# Altium PCB Copy of PCB1.PcbDoc
Units mil, origin at the board's own origin, x right, y up, seen from the top; angles counter-clockwise.
Board outline 2955 x 1595 mil, 2 copper layers (Top Layer, Bottom Layer); 109 components, 71 nets, 326 pads, 42 vias.
Unrouted connection lines stored in the file: 84.
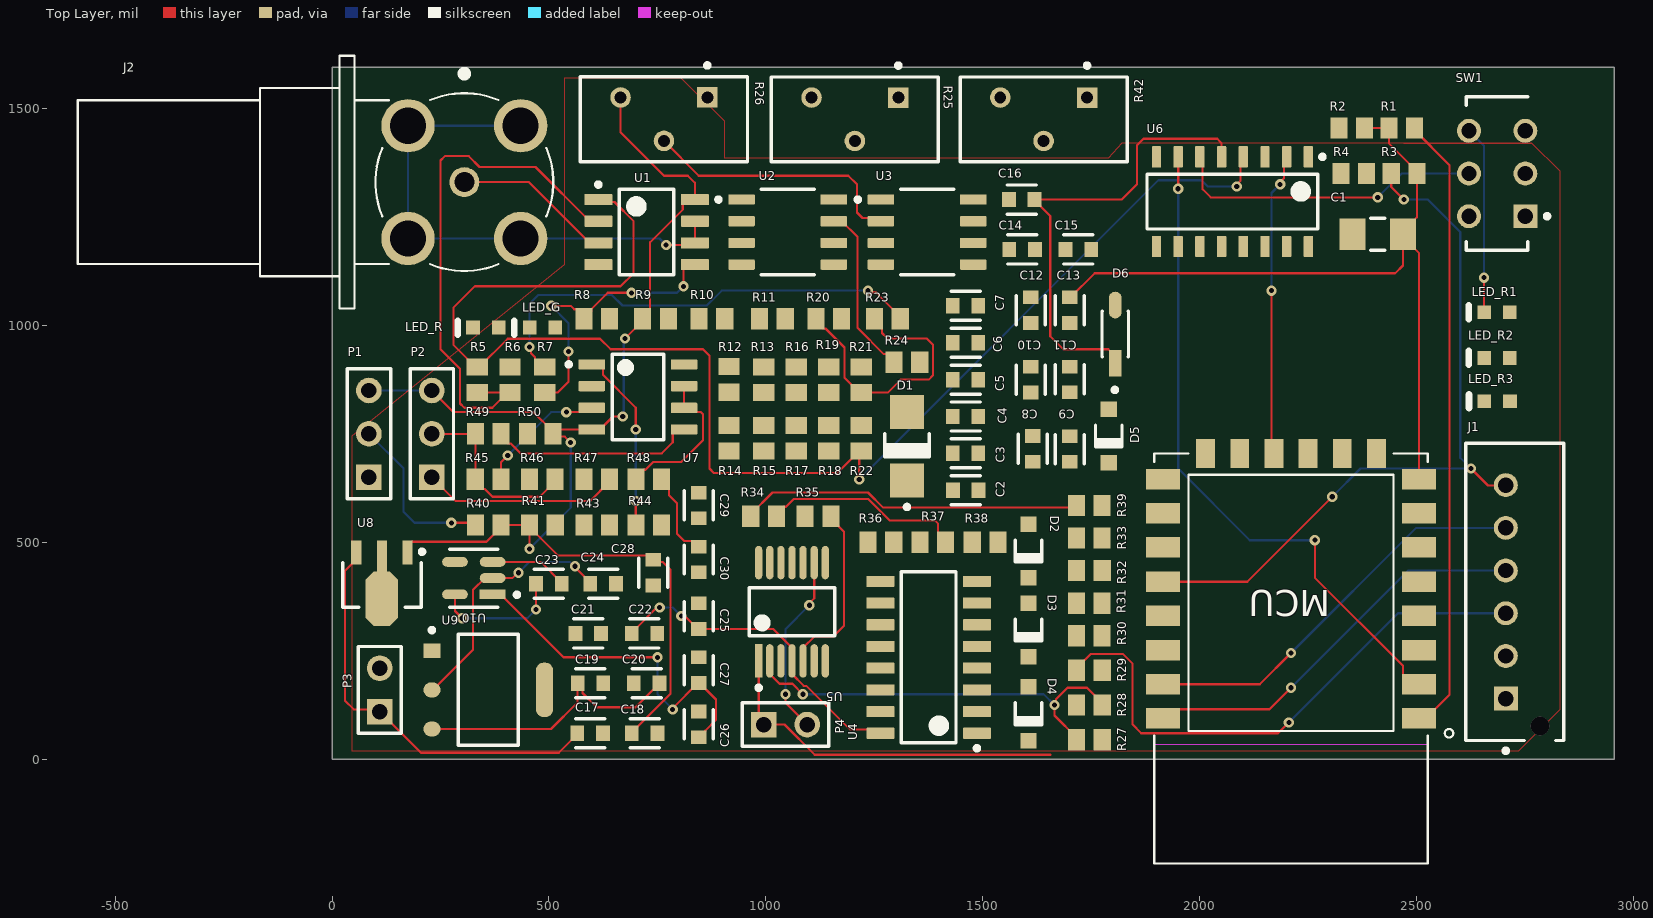
[diagram p0: Top Layer view]
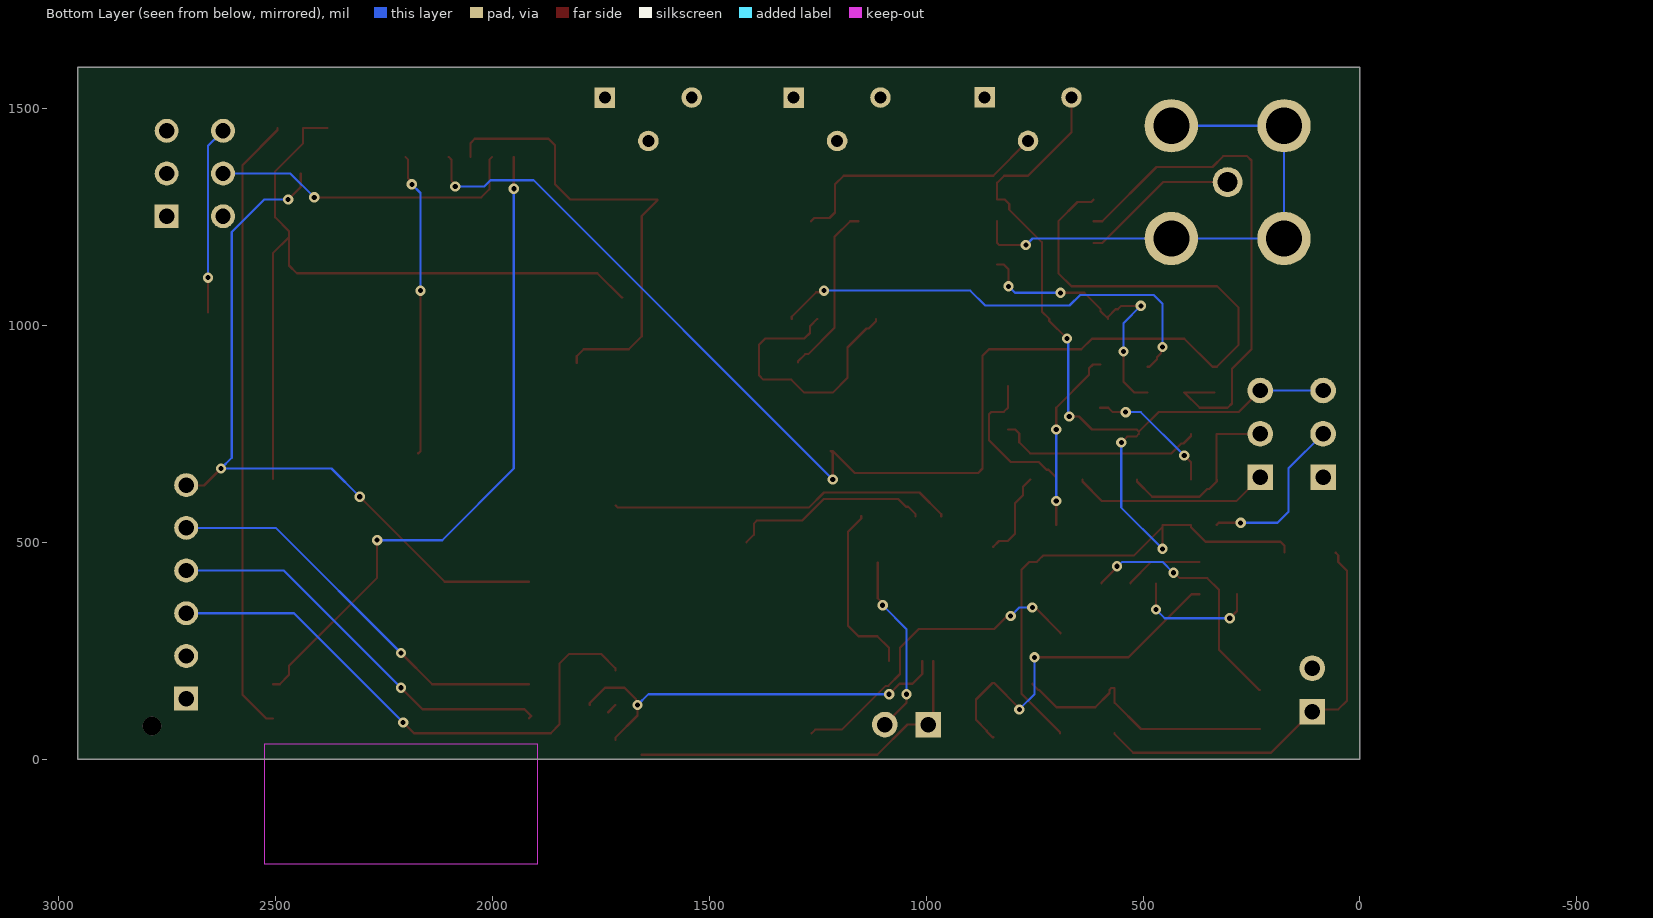
[diagram p1: Bottom Layer view, seen from below]

## Layer stack, top to bottom
Top Solder: solder mask 0.4, Solder Resist, Dk 3.5
Top Layer: signal copper 1.4
Dielectric 1: dielectric 12.6, FR-4, Dk 4.8
Bottom Layer: signal copper 1.4
Bottom Solder: solder mask 0.4, Solder Resist, Dk 3.5

## Board outline
0,0 2955,0 2955,1595 0,1595

## Design rules (kind name [scope] priority, off if disabled: settings)
BoardOutlineClearance [All] p1: gap=7.87 ignorepadtopadclearanceinfootprint=FALSE
Clearance [All] p1: gap=5 ignorepadtopadclearanceinfootprint=FALSE except(9.84: Arc-Hole Track-Hole SMDPad-Hole THPad-Hole Via-Hole Fill-Hole Poly-Hole Region-Hole Text-Hole)
ComponentClearance [All] p1: gap=5 collisioncheckmode=3 verticalgap=5 showdistances=TRUE
DiffPairsRouting [All] p1: maxlimit=10 minlimit=5 mostfreqgap=5 toplayer_minwidth=5 toplayer_maxwidth=1000 toplayer_prefwidth=5 bottomlayer_minwidth=5 bottomlayer_maxwidth=1000 bottomlayer_prefwidth=5 maxuncoupledlength=500
Height [All] p1: minheight=0 maxheight=71497.94 prefheight=500
HoleSize [All] p1: absolutevalues=TRUE maxlimit=248.03 minlimit=11.81 maxpercent=80.000 minpercent=20.000
HoleToHoleClearance [All] p1: gap=9.84 allowstackedmicrovias=FALSE
MinimumAnnularRing [All] p1: minimumring=3
MinimumSolderMaskSliver [All] p1: minsoldermaskwidth=0
PlaneClearance [All] p1: clearance=5
PlaneConnect PlaneConnectPowerPads [InPadClass('PowerPads')] p1: planeconnectstyle=Direct reliefexpansion=20 reliefentries=4 reliefconductorwidth=10 reliefairgap=10
PlaneConnect [All] p2: pad.planeconnectstyle=Relief pad.reliefexpansion=11.81 pad.reliefentries=4 pad.reliefconductorwidth=5 pad.reliefairgap=5 via.planeconnectstyle=Direct via.reliefexpansion=11.81 via.reliefentries=4 via.reliefconductorwidth=5 via.reliefairgap=5
PolygonConnect PolygonConnectPowerPads [All vs (InPadClass('PowerPads'))] p1: connectstyle=Direct reliefconductorwidth=10 reliefentries=4 polygonreliefangle="90 Angle" airgapwidth=10
PolygonConnect [All] p2: thpad.connectstyle=Relief thpad.reliefconductorwidth=5 thpad.reliefentries=4 thpad.polygonreliefangle="90 Angle" thpad.airgapwidth=5 smdpad.connectstyle=Relief smdpad.reliefconductorwidth=5 smdpad.reliefentries=4 smdpad.polygonreliefangle="90 Angle" smdpad.airgapwidth=5 via.connectstyle=Direct via.reliefconductorwidth=5 via.reliefentries=4 via.polygonreliefangle="90 Angle" via.airgapwidth=5
RoutingVias [All] p1: holewidth=11.81 width=23.62 viastyle="Through Hole" minholewidth=11.81 minwidth=23.62 maxholewidth=23.62 maxwidth=259.84
SilkToSilkClearance [All] p1: silktosilkclearance=0
SilkToSolderMaskClearance [IsPad] p1: minsilkscreentomaskgap=5 clearancetoexposedcopper=TRUE
SolderMaskExpansion [All] p1: expansion=2.95 istentingtop=FALSE
Width [All] p1: maxlimit=1000 minlimit=5 preferedwidth=5 minimp=50.000000 maximp=50.000000 favimp=50.000000
20 further rules are at their usual default settings.

## Classes and differential pairs
component class U_Temp_sensor: P1 R40
component class U_TBD_Sensor: C28 C29 C30 LED_R1 LED_R2 P2 R41 R42 R43 R44 R45 R46 R47 R48 R49 R50 SW1 U7
component class U_Power_supply: C17 C18 C19 C20 C21 C22 C23 C24 C25 C26 C27 J3 P3 U8 U9 U10
component class U_TDS_sensor: C8 C9 C10 C11 C12 C13 C14 C15 C16 D2 D3 D4 D5 D6 LED_R3 P4 R27 R28 R29 R30 R31 R32 R33 R34 R35 R36 R37 R38 R39 U4 U5
component class U_pH_sensor: C2 C3 C4 C5 C6 C7 D1 J2 LED_G LED_R R5 R6 R7 R8 R9 R10 R11 R12 R13 R14 R15 R16 R17 R18 R19 R20 R21 R22 R23 R24 R25 R26 U1 U2 U3
component class U_MCU: C1 MCU R1 R2 R3 R4 U6 U_MCU

## Components (designator, comment, footprint, x,y, rotation, side; value= is the part's Value field where it differs from the comment)
C1 "100uF" FP-GRM31M-0_15-IPC_A 2410,1210 r0 top
C2 "104" FP-CC0603-DA-MFG 1460.47,620 r180 top value="100 nF"
C3 "104" FP-CC0603-DA-MFG 1460,705 r0 top value="100 nF"
C4 "104" FP-CC0603-DA-MFG 1460,790 r180 top value="100 nF"
C5 "104" FP-CC0603-DA-MFG 1460,875 r180 top value="100 nF"
C6 "104" FP-CC0603-DA-MFG 1460,960 r180 top value="100 nF"
C7 "104" FP-CC0603-DA-MFG 1460,1045 r180 top value="100 nF"
C8 "100nF" FP-CC0603-DA-MFG 1615,715.47 r90 top value="100 nF"
C9 "1nF" FP-CC0603-DA-MFG 1700,715 r90 top value="100 nF"
C10 "100nF" FP-CC0603-DA-MFG 1610,875 r90 top value="100 nF"
C11 "4.7uF" FP-CC0603-DA-MFG 1700,875.47 r270 top value="100 nF"
C12 "100nF" FP-CC0603-DA-MFG 1610,1035 r270 top value="100 nF"
C13 "4.7uF" FP-CC0603-DA-MFG 1700,1035 r270 top value="100 nF"
C14 "100nF" FP-CC0603-DA-MFG 1590.47,1175 r0 top value="100 nF"
C15 "1uF" FP-CC0603-DA-MFG 1720,1175 r180 top value="100 nF"
C16 "1uF" FP-CC0603-DA-MFG 1589.53,1290 r180 top value="100 nF"
C17 "470uF" FP-CC0603-DA-MFG 595,60 r0 top value="100 nF"
C18 "1uF" FP-CC0603-DA-MFG 720.47,60 r0 top value="100 nF"
C19 "10uF" FP-CC0603-DA-MFG 595.47,175 r0 top value="100 nF"
C20 "100nF" FP-CC0603-DA-MFG 725,175 r180 top value="100 nF"
C21 "10uF" FP-CC0603-DA-MFG 590.47,290 r180 top value="100 nF"
C22 "100nF" FP-CC0603-DA-MFG 720,290 r0 top value="100 nF"
C23 "10uF" FP-CC0603-DA-MFG 499.53,405 r0 top value="100 nF"
C24 "100nF" FP-CC0603-DA-MFG 625,405 r0 top value="100 nF"
C25 "10uF" FP-CC0603-DA-MFG 845,330 r90 top value="100 nF"
C26 "10uF" FP-CC0603-DA-MFG 845,80.47 r90 top value="100 nF"
C27 "100nF" FP-CC0603-DA-MFG 845,205.47 r90 top value="100 nF"
C28 "10uF" FP-CC0603-DA-MFG 740,430 r270 top value="100 nF"
C29 "100nF" FP-CC0603-DA-MFG 845,585 r90 top value="100 nF"
C30 "100nF" FP-CC0603-DA-MFG 845,460.47 r270 top value="100 nF"
D1 "SZ1SMA5942BT3G" ONSC-SMA-2-403D-02_F_V 1325,721.26 r90 top
D2 "1N4148W-7-F" DIOD-SOD123-2_V 1605,480 r270 top
D3 "1N4148W-7-F" DIOD-SOD123-2_V 1605,297.99 r270 top
D4 "1N4148W-7-F" DIOD-SOD123-2_V 1605,105 r270 top
D5 "1N4148W-7-F" DIOD-SOD123-2_V 1790,745 r270 top
D6 "1N5819HW-7-F" FP-SOD123-IPC_A 1805,980 r90 top
J1 "B6B-XH-AM(LF)(SN)" FP-B6B-XH-AM_LF_SN-MFG 2725.67,385.79 r270 top
J2 "5-1634556-0" TE_5-1634556-0 304.92,1330.08 r0 top
LED_G "HSMY-C190" AVAG-HSMX-C190_V 485,995 r180 top
LED_R "HSMY-C190" AVAG-HSMX-C190_V 354.53,995 r180 top
LED_R1 "HSMY-C190" AVAG-HSMX-C190_V 2684.53,1030 r180 top
LED_R2 "HSMY-C190" AVAG-HSMX-C190_V 2684.53,925 r180 top
LED_R3 "HSMY-C190" AVAG-HSMX-C190_V 2685,825 r180 top
MCU "ESP8266-12E/ESP-12E" XCVR_ESP8266-12E/ESP-12E 2210,370 r180 top
P1 "Header 3" HDR1X3 85,650 r90 top
P2 "Header 3" HDR1X3 230,650 r90 top
P3 "Header 2" HDR1X2 110,110 r90 top
P4 "Header 2" HDR1X2 995,80 r0 top
R1 "10K" RESC2013X60X40LL20T25_A 2465,1455 r0 top
R2 "10K" RESC2013X60X40LL20T25_A 2350,1455 r0 top
R3 "10K" RESC2013X60X40LL20T25_A 2470.47,1350 r180 top
R4 "10K" RESC2013X60X40LL20T25_A 2354.53,1350 r0 top
R5 "10K" RESC2013X60X40LL20T25_A 335,875 r90 top
R6 "10K" RESC2013X60X40LL20T25_A 410,875 r270 top
R7 "10K" RESC2013X60X40LL20T25_A 490,875 r90 top
R8 "10K" RESC2013X60X40LL20T25_A 610,1015 r0 top
R9 "10K" RESC2013X60X40LL20T25_A 745.47,1015 r180 top
R10 "10K" RESC2013X60X40LL20T25_A 875.47,1015 r0 top
R11 "10K" RESC2013X60X40LL20T25_A 1015,1015 r0 top
R12 "10K" RESC2013X60X40LL20T25_A 915,875.47 r90 top
R13 "10K" RESC2013X60X40LL20T25_A 995,875 r90 top
R14 "10K" RESC2013X60X40LL20T25_A 915,740 r90 top
R15 "10K" RESC2013X60X40LL20T25_A 995,740 r90 top
R16 "10K" RESC2013X60X40LL20T25_A 1070,875 r90 top
R17 "10K" RESC2013X60X40LL20T25_A 1070,740 r90 top
R18 "10K" RESC2013X60X40LL20T25_A 1145,740 r90 top
R19 "10K" RESC2013X60X40LL20T25_A 1145,874.53 r90 top
R20 "1K" RESC2013X60X40LL20T25_A 1144.53,1015 r180 top
R21 "1K" RESC2013X60X40LL20T25_A 1220,874.53 r90 top
R22 "1K" RESC2013X60X40LL20T25_A 1220,740 r90 top
R23 "1K" RESC2013X60X40LL20T25_A 1280,1015 r180 top
R24 "20K" RESC2013X60X40LL20T25_A 1325,915 r180 top
R25 "3296Y-1-103LF" FP-3296Y-MFG 1205,1474.8 r90 top
R26 "3296Y-1-103LF" FP-3296Y-MFG 765,1475 r90 top
R27 "100K" RESC2013X60X40LL20T25_A 1745.47,45 r180 top
R28 "6.8K" RESC2013X60X40LL20T25_A 1745.47,125 r180 top
R29 "5.6K" RESC2013X60X40LL20T25_A 1745.47,205 r180 top
R30 "10K" RESC2013X60X40LL20T25_A 1745,285 r180 top
R31 "100K" RESC2013X60X40LL20T25_A 1745,360 r0 top
R32 "5.6K" RESC2013X60X40LL20T25_A 1745.47,435 r180 top
R33 "1M" RESC2013X60X40LL20T25_A 1745,510 r180 top
R34 "10K" RESC2013X60X40LL20T25_A 994.53,560 r0 top
R35 "10K" RESC2013X60X40LL20T25_A 1120,560 r180 top
R36 "10K" RESC2013X60X40LL20T25_A 1265,500 r0 top
R37 "10K" RESC2013X60X40LL20T25_A 1384.53,500 r180 top
R38 "10K" RESC2013X60X40LL20T25_A 1505,500 r180 top
R39 "5.6K" RESC2013X60X40LL20T25_A 1745,585 r180 top
R40 "4.7K" RESC2013X60X40LL20T25_A 360,540 r180 top
R41 "1K" RESC2013X60X40LL20T25_A 485,540 r0 top
R42 "3296Y-1-103LF|10K" FP-3296Y-MFG 1640,1474.8 r90 top
R43 "22R" RESC2013X60X40LL20T25_A 610,540 r180 top
R44 "100R" RESC2013X60X40LL20T25_A 730,540 r180 top
R45 "10K" RESC2013X60X40LL20T25_A 359.53,645 r180 top
R46 "4.7K" RESC2013X60X40LL20T25_A 484.53,645 r180 top
R47 "500R" RESC2013X60X40LL20T25_A 610,645 r180 top
R48 "1K" RESC2013X60X40LL20T25_A 730,645 r180 top
R49 "10K" RESC2013X60X40LL20T25_A 360,750 r180 top
R50 "1K" RESC2013X60X40LL20T25_A 480,750 r180 top
SW1 "JS202011CQN" FP-JS202011CQN-MFG 2685.04,1350 r90 top
U1 "TLC4502CDR" D0008A_M 725,1215 r0 top
U2 "LM358ADR" FP-D0008A-MFG 1050,1215 r0 top
U3 "LM358ADR" FP-D0008A-MFG 1371.3,1215 r0 top
U4 "CD4060BM" D0016A_M 1375,235 r180 top
U5 "LMV324IPWR" FP-PW0014A-IPC_A 1060,340 r90 top
U6 "SN74HC153DR" D0016A_L 2075,1285 r270 top
U7 "LMV358IDR" FP-D0008A-MFG 705,835 r0 top
U8 "L78L05ABUTR" SOT-89_N 115,401.5 r270 top
U9 "AMS1117-3.3" FP-AMS1117-IPC_C 360,160 r0 top
U10 "TPS60400DBVR" FP-DBV0005A-IPC_B 326.67,417.6 r180 top

## Footprints (in the part's own frame and the unit in brackets; to place one, negate y for a bottom-side part, rotate by r counter-clockwise, add the part's x,y. Pads: shape width x height; smd on the part's side, far side on the other; paste and mask are expansions set on the pad)
AVAG-HSMX-C190_V [mm] "SMD, 2-Leads, Body 1.6x0.8mm, Height 0.9mm"
  rect 0.8x0.8 smd: 1(-0.75,0) 2(0.75,0)
  silkscreen extent 1.65,-0.4 1.65,0.4, body extent -0.8,-0.4 0.8,0.4, height 0.9
D0008A_M [mm] "SOIC, 8-Leads, Body 5x4mm, Pitch 1.27mm, IPC Low Density"
  rrect15% 1.65x0.65 smd: 1(-2.825,1.905) 2(-2.825,0.635) 3(-2.825,-0.635) 4(-2.825,-1.905) 5(2.825,-1.905) 6(2.825,-0.635) 7(2.825,0.635) 8(2.825,1.905)
  silkscreen extent -2.95,-2.5 1.6,2.9, body extent -3,-2.45 3,2.45, height 1.63
D0016A_L [mm] "SOIC, 16-Leads, Body 10x4mm, Pitch 1.27mm, IPC High Density"
  rrect18% 1.25x0.55 smd: 1(-2.625,4.445) 2(-2.625,3.175) 3(-2.625,1.905) 4(-2.625,0.635) 5(-2.625,-0.635) 6(-2.625,-1.905) 7(-2.625,-3.175) 8(-2.625,-4.445) 9(2.625,-4.445) 10(2.625,-3.175) 11(2.625,-1.905) 12(2.625,-0.635) 13(2.625,0.635) 14(2.625,1.905) 15(2.625,3.175) 16(2.625,4.445)
  silkscreen extent -2.75,-5 1.6,5.4, body extent -3,-4.95 3,4.95, height 1.59
D0016A_M [mm] "SOIC, 16-Leads, Body 10x4mm, Pitch 1.27mm, IPC Low Density"
  rrect15% 1.65x0.65 smd: 1(-2.825,4.445) 2(-2.825,3.175) 3(-2.825,1.905) 4(-2.825,0.635) 5(-2.825,-0.635) 6(-2.825,-1.905) 7(-2.825,-3.175) 8(-2.825,-4.445) 9(2.825,-4.445) 10(2.825,-3.175) 11(2.825,-1.905) 12(2.825,-0.635) 13(2.825,0.635) 14(2.825,1.905) 15(2.825,3.175) 16(2.825,4.445)
  silkscreen extent -2.95,-5 1.6,5.44, body extent -3,-4.95 3,4.95, height 1.59
DIOD-SOD123-2_V [mm] "SOD123, 2-Leads, Body 2.7x1.55mm, Height 1.45mm"
  rect 0.9x0.95 smd: 1(-1.575,0) 2(1.575,0)
  silkscreen extent -0.64,-0.83 0.64,0.77, body extent -1.35,-0.77 1.35,0.77, height 1.45
FP-3296Y-MFG [mm]
  rect 1.2x1.2 hole 0.7 paste-1000 mask+0: 1(1.275,-2.54)
  round 1.2 hole 0.7 paste-1000 mask+0: 2(-1.265,0) 3(1.275,2.54)
  silkscreen extent -2.48,-4.89 3.27,4.89, body extent -2.58,-4.99 2.58,4.99, height 0.25
FP-AMS1117-IPC_C [mm]
  rect 1.004x0.872 smd paste+0 mask+0: 1(-3.295,2.29)
  rrect100% 1.004x0.872 smd paste+0 mask+0: 2(-3.295,0) 3(-3.295,-2.29)
  rrect87% 1.004x3.182 smd paste+0 mask+0: 4(3.295,0)
  silkscreen extent -3.42,-3.25 1.75,3.62, body extent -3.9,-3.35 3.9,3.35, height 0.25
FP-B6B-XH-AM_LF_SN-MFG [mm]
  rect 1.4x1.4 hole 0.9 paste-1000 mask+0: 1(6.25,-0.525)
  round 1.4 hole 0.9 paste-1000 mask+0: 2(3.75,-0.525) 3(1.25,-0.525) 4(-1.25,-0.525) 5(-3.75,-0.525) 6(-6.25,-0.525)
  round 1.1 hole 1.1 unplated paste-1000 mask+0: ""(7.85,1.475)
  silkscreen extent -8.7,-2.88 9.42,2.88, body extent -8.8,-2.98 8.8,2.98, height 0.25
FP-CC0603-DA-MFG [mm]
  rect 0.8x0.9 smd paste+0 mask+0: 1(-0.75,0) 2(0.75,0)
  silkscreen extent -0.85,-0.85 0.85,0.85, body extent -1.35,-0.75 1.35,0.75, height 0.25
FP-D0008A-MFG [mm]
  rrect17% 1.55x0.6 smd paste+0 mask+0: 1(-2.7,1.905) 2(-2.7,0.635) 3(-2.7,-0.635) 4(-2.7,-1.905) 5(2.7,-1.905) 6(2.7,-0.635) 7(2.7,0.635) 8(2.7,1.905)
  silkscreen extent -4.17,-2.5 1.55,2.5, body extent -3.57,-2.75 3.57,2.75, height 0.25
FP-DBV0005A-IPC_B [mm]
  rect 1.505x0.572 smd paste+0 mask+0: 1(-1.1,0.95)
  rrect100% 1.505x0.572 smd paste+0 mask+0: 2(-1.1,0) 3(-1.1,-0.95) 4(1.1,-0.95) 5(1.1,0.95)
  silkscreen extent -2.65,-1.7 1.4,1.7, body extent -2.1,-1.7 2.1,1.7, height 0.25
FP-GRM31M-0_15-IPC_A [mil]
  rect 59.28x73.16 smd paste+0 mask+0: 1(-58.12,0) 2(58.12,0)
  silkscreen extent -17,-37 17,37, body extent -107,-56 107,56, height 10
FP-JS202011CQN-MFG [mm]
  rect 1.4x1.4 hole 0.9 paste-1000 mask+0: 1(-2.5,-1.65)
  round 1.4 hole 0.9 paste-1000 mask+0: 2(0,-1.65) 3(2.5,-1.65) 4(2.5,1.65) 5(0,1.65) 6(-2.5,1.65)
  silkscreen extent -4.5,-3.05 4.5,1.8, body extent -4.6,-2.45 4.6,2.45, height 0.25
FP-PW0014A-IPC_A [mm]
  rect 1.955x0.421 smd paste+0 mask+0: 1(-2.875,1.95)
  rrect100% 1.955x0.421 smd paste+0 mask+0: 2(-2.875,1.3) 3(-2.875,0.65) 4(-2.875,0) 5(-2.875,-0.65) 6(-2.875,-1.3) 7(-2.875,-1.95) 8(2.875,-1.95) 9(2.875,-1.3) 10(2.875,-0.65) 11(2.875,0) 12(2.875,0.65) 13(2.875,1.3) 14(2.875,1.95)
  silkscreen extent -4.57,-2.5 1.4,2.5, body extent -4.35,-3 4.35,3, height 0.25
FP-SOD123-IPC_A [mil]
  rect 61.32x29.23 smd paste+0 mask+0: 1(-66.94,0)
  rrect100% 61.32x29.23 smd paste+0 mask+0: 2(66.94,0)
  silkscreen extent -134,-31 52,31, body extent -117,-50 117,50, height 10
HDR1X2 [mm] "Connector; Header; 2 Position"
  rect 1.5x1.5 hole 0.9: 1(0,0)
  round 1.5 hole 0.9: 2(2.54,0)
  silkscreen extent -1.27,-1.27 3.81,1.27
HDR1X3 [mm] "Connector; Header; 3 Position"
  rect 1.5x1.5 hole 0.9: 1(0,0)
  round 1.5 hole 0.9: 2(2.54,0) 3(5.08,0)
  silkscreen extent -1.27,-1.27 6.35,1.27
ONSC-SMA-2-403D-02_F_V [mm] "Molded, 2-Leads, Body 4.32x2.6mm"
  rect 2x2 smd: 1(-2,0) 2(2,0)
  silkscreen extent -3.67,-1.3 0.74,1.3, body extent -2.16,-1.3 2.16,1.3, height 2.2
RESC2013X60X40LL20T25_A [mm] "Chip Resistor, 2-Leads, Body 2.20x1.35mm, IPC High Density"
  rect 1x1.25 smd: 1(-0.75,0) 2(0.75,0)
  body extent -1.1,-0.67 1.1,0.67, height 0.6
SOT-89_N [mm] "SOT89, 3-Leads, Body 4.5x2.4 mm, Pitch 1.5mm, Lead Span 4.1mm, IPC Medium Density"
  rect 1.4x0.6 smd: 1(-1.9,1.5) 3(-1.9,-1.5)
  rect 1.8x0.6 smd: 2(-1.7,0)
  oct 3.2x1.9 smd: 2(0.8,0)
  silkscreen extent -2.07,-2.3 1.3,2.48, body extent -1.3,-2.3 1.3,2.3, height 1.6
TE_5-1634556-0 [mm]
  round 1.755 hole 1.17: 1(0,0)
  round 3.126 hole 2.11: 2(3.3,3.3) 3(-3.3,3.3) 4(-3.3,-3.3) 5(3.3,-3.3)
  silkscreen extent -22.63,-7.4 5.2,7.4
XCVR_ESP8266-12E/ESP-12E [mm]
  rect 2x1.2 smd: 1(-7.5,7) 2(-7.5,5) 3(-7.5,3) 4(-7.5,1) 5(-7.5,-1) 6(-7.5,-3) 7(-7.5,-5) 8(-7.5,-7) 15(7.5,-7) 16(7.5,-5) 17(7.5,-3) 18(7.5,-1) 19(7.5,1) 20(7.5,3) 21(7.5,5) 22(7.5,7)
  rect 1.1x1.7 smd: 9(-5,-8.5) 10(-3,-8.5) 11(-1,-8.5) 12(1,-8.5) 13(3,-8.5) 14(5,-8.5)
  Keep-Out Layer region: 8,8.51 -8.009,8.51 -8.009,15.5 8,15.5
  Keep-Out Layer region: 8,8.51 -8.009,8.51 -8.009,15.5 8,15.5
  silkscreen extent -9.5,-8.5 8,15.5, body extent -8,-12 8,12, height 3

## Part data
C1: library part CMP-06035-007547-1, "Chip Multilayer Ceramic Capacitors for General Purpose, 1206, 0.10uF, SL, +350/-1000ppm/°C, 5%, 50V", Capacitance=100nF, Case Code (Imperial)=1206, Case Code (Metric)=3216, Dielectric Material=Ceramic, Max Operating Temperature=125°C, Min Operating Temperature=-55°C, Temperature Coefficient=-1000ppm/°C, Tolerance=5%, Voltage=50V, Case/Package=1206, Depth=1.6mm, Dissipation Factor=0.025%, Height=1.15mm, Length=0.126inch, Mount="Surface Mount", Packaging="Tape and Reel", Termination=SMD/SMT, Thickness=0.049inch, Voltage Rating=50V, Voltage Rating (DC)=50V, Width=0.063inch
C2 C3 C4 C5 C6 C7 C8 C9 C10 C11 C12 C13 C14 C15 C16 C17 C18 C19 C20 C21 C22 C23 C24 C25 C26 C27 C28 C29 C30: library part CMP-03422-001228-1, "CAP CER 0.1UF 10V X7R 0603", Capacitance="100 nF", Manufacturer=YAGEO, Manufacturer Part Number=CC0603KRX7R6BB104, Package=CC0603-DA, Temperature="-55°C to +125°C", Temperature Characteristic=X7R, Temperature Coefficient=15%, Temperature Range High=+125°C, Temperature Range Low=-55°C, Tolerance=0.1, Voltage="10 V", Automotive=No, Category=Cap, ComponentLink2Description=Datasheet, ComponentLink2URL=http://www.yageo.com/documents/recent/UPY-GPHC_X7R_6.3V-to-50V_18.pdf, Device Class L1="Passive Components", Device Class L2=Capacitors, Device Class L3="Ceramic Capacitors", Digikey Description="CAP CER 0.1UF 10V X7R 0603", Footprint Url=http://www.yageo.com/exep/pages/download/literatures/UPY-C_GEN_24.pdf, Height=0.9mm, Lead Free=Yes, Material=Ceramic, Mouser Description="0603 0.1 uF 10 V ±10 % Tolerance X7R SMT Multilayer Ceramic Capacitor", Octopart=https://octopart.com/cc0603krx7r6bb104-yageo-9291607, RoHS=TRUE, Voltage Rating="10 V"
D1: library part CMP-1060-00121-1, "1.5 W Zener Voltage Regulator, 2-Pin SMA, Pb-Free, Tape and Reel", Manufacturer="On Semiconductor", ComponentLink1Description="Manufacturer URL", ComponentLink1URL=http://www.onsemi.com/, ComponentLink2Description=Datasheet, ComponentLink2URL=http://www.onsemi.com/pub_link/Collateral/1SMA5913BT3-D.PDF, ComponentLink3Description="Package Specification", ComponentLink3URL=http://www.onsemi.com/pub_link/Collateral/1SMA5913BT3-D.PDF, DatasheetVersion="Rev. 8", Mounting Technology="Surface Mount", PackageDescription="2-Pin Small Molded Package, J-Bend Lead, Body 2.605 x 4.315 mm", PackageReference=SMA-2-403D-02_F, PackageVersion="Rev. F, 11/2008", Packing="Tape and Reel", PartNumber=SZ1SMA5942BT3G, RoHS=Pb-Free, VZ Typ (V)=51
D2 D3 D4 D5: library part CMP-2000-04932-2, "Fast Switching Diode, 100 V, 0.15 A, -65 to 150 degC, 2-Pin?SOD123, RoHS, Tape and Reel", If - Forward Current=0.15A, Ir - Reverse Current=1uA, Manufacturer=DiodesIncorporated, Max Surge Current=2A, Maximum Operating Temperature=+150C, Minimum Operating Temperature=-65C, Operating Temperature Range=-65Cto+150C, Package / Case=SOD-123, Package Reference=SOD123-2, Peak Reverse Voltage=100V, Vf - Forward Voltage=1.25V, Brand=DiodesIncorporated, Configuration=Single, Datasheet URL=http://www.farnell.com/datasheets/1915529.pdf, Datasheet Version="Rev. 24-2, 10/2013", Factory Pack Quantity=3000, Height=1.25mm, Length=2.85mm, Manufacturer URL=http://www.diodes.com/, Mounting Style=SMD/SMT, Package URL=http://www.diodes.com/datasheets/ds18004.pdf, Packaging=Reel, Product=SwitchingDiodes, Product Category=Diodes-GeneralPurpose,Power,Switching, Recovery Time=4ns, RoHS=True, Series=1N4148, Type=SwitchingDiode, Unit Weight=0.000353oz, Width=1.7mm
D6: library part CMP-0303-00003-3, "DIODE SCHOTTKY 40V 1A SOD123", Average Rectified Current=1A, Capacitance=110pF, Case/Package=SOD-123-2, Forward Voltage=450mV, Max Forward Surge Current (Ifsm)=25A, Max Operating Temperature=125°C, Max Power Dissipation=450mW, Max Repetitive Reverse Voltage (Vrrm)=40V, Min Operating Temperature=-65°C, Package Quantity=3000, Peak Reverse Current=50uA, Contact Plating=Tin, Current Rating=1A, Element Configuration=Single, Forward Current=1A, Height=1.25mm, Lead Free="Lead Free", Length=2.85mm, Max Reverse Voltage (DC)=40V, Number of Pins=2, Output Current=1A, Packaging="Tape and Reel", Peak Non-Repetitive Surge Current=25A, Polarity=Standard, Radiation Hardening=No, REACH SVHC="No SVHC", Termination=SMD/SMT, Voltage Rating (DC)=40V, Weight=0.000353oz, Width=1.7mm
J1: library part CMP-17439-000167-1, "CONN HEADER VERT 6POS 2.5MM", Current Rating=3A, Flammability Rating="UL94 V-0", Insulation Color=Natural, Max Operating Temperature=85°C, Min Operating Temperature=-25°C, Voltage Rating=250V, Connector Type=Header, Contact Finish - Mating=TIN, Contact Material=Brass, Contact Plating=Copper, Contact Shape=Square, Contact Type="Male Pin", Fastening Type=Detent, Height=7mm, Insulation Material=Nylon, Length=17.4mm, Mated Stacking Heights=9.8mm, Mount="Through Hole", Number of Pins=6, Number of Poles=6, Number of Positions=6, Number of Rows=1, Packaging=Bulk, Pitch=2.5mm, Series=XH, Shape=Straight, Termination=Press-Fit, Width=5.75mm
J2: "Right Angle 50Ohm Thru Hole Bulkhead Fitting BNC Conn; jack; Solder Term Nickel", Package=None, Availability=Unavailable, MF="TE Connectivity", MP=5-1634556-0, Price=None, SnapEDA_Link=https://www.snapeda.com/parts/5-1634556-0/TE%20Connectivity%20AMP%20Connectors/view-part/468364/?ref=snap
LED_G LED_R LED_R1 LED_R2 LED_R3: library part CMP-1744-00003-1, "LED Uni-Color Yellow, 65 mW, 20 mA, -40 to 85 degC, 2-Pin SMD, RoHS, Tape and Reel", Case Code (Imperial)=0603, Case Code (Metric)=1608, Max Operating Temperature="155 degC", Min Operating Temperature="-55 degC", Package Quantity=5000, Power Rating="100 mW", Resistance="390 Ohm", Tolerance=1%, Voltage Rating="50 V", Case\Package=0603, ComponentLink1Description="Manufacturer URL", ComponentLink1URL=http://www.avagotech.com/, ComponentLink2Description=Datasheet, ComponentLink2URL=http://docs.avagotech.com/docs/AV02-0551EN, ComponentLink3Description="Package Specification", ComponentLink3URL=http://www.fairchildsemi.com/dwg/MA/MA03D.pdf, DatasheetVersion=Mar-12, Height="0.45 mm", Length="1.6 mm", Mount="Surface Mount", PackageDescription="2-Pin Surface Mount Device, Body 1.6 x 0.8 mm, Height 0.9 mm", PackageReference=HSMX-C190, Packaging="Tape and Reel", Pins=2, REACH SVHC="No SVHC", RoHSCompliant=true, Voltage Rating (DC)="50 V", Width="0.8 mm"
MCU: "This WiFi module has a 32-bit MCU micro and clock speeds supporting 80 MHz or 160 MHz. Supports the RTOS and integrated Wi-Fi MAC/BB/RF/PA/LNA, and has an on-board antenna.", Package=None, Availability="Not in stock", Check_prices=https://www.snapeda.com/parts/ESP8266-12E/ESP-12E/AI-Thinker/view-part/?ref=eda, MF=AI-Thinker, MP=ESP8266-12E/ESP-12E, Price=None, SnapEDA_Link=https://www.snapeda.com/parts/ESP8266-12E/ESP-12E/AI-Thinker/view-part/?ref=snap
P1 P2: "Header, 3-Pin", LatestRevisionDate=17-Jul-2002, LatestRevisionNote="Re-released for DXP Platform.", Publisher="Altium Limited"
P3 P4: "Header, 2-Pin", LatestRevisionDate=17-Jul-2002, LatestRevisionNote="Re-released for DXP Platform.", Publisher="Altium Limited"
R1 R2 R3 R4 R5 R6 R7 R8 R9 R10 R11 R12 R13 R14 R15 R16 R17 R18 R19 R20 R21 R22 R23 R24 R27 R28 R29 R30 R31 R32 R33 R34 R35 R36 R37 R38 R39 R40 R41 R43 R44 R45 R46 R47 R48 R49 R50: library part CMP-2001-00582-2, "Metal Film Chip Resistor, High Reliability Type, 0.125 W, +/- 0.1%, -55 to 155 degC, 0805 (2012 Metric), RoHS, Tape and Reel", Case Code - in=0805, Case Code - mm=2012, Manufacturer=Panasonic, Operating Temperature Range=-55Cto+155C, Package / Case=0805(2012metric), Package Description="2-Pin Surface Mount Device, Body 2 x 1.25 mm", Power Rating=125mW(1/8W), Resistance=10kOhms, Temperature Coefficient=25PPM/C, Tolerance=0.1%, Voltage Rating=100V, Brand=Panasonic, Datasheet URL=https://industrial.panasonic.com/cdbs/www-data/pdf/RDM0000/AOA0000C307.pdf, Datasheet Version=02/2016, Factory Pack Quantity=5000, Height=0.5mm, Length=2mm, Manufacturer URL=http://www.panasonic.com/, Mounting Technology=SurfaceMount, Package Reference=0805, Packaging=Reel, Product=ThinFilmResistorsSMD, Product Category=ThinFilmResistors-SMD, RoHS=Details, Series=ERA-6A, Termination Style=SMD/SMT, Type=MetalFilmChipResistors, Width=1.25mm
R25 R26 R42: library part CMP-07234-000015-2, "TRIMMER 10K OHM 0.5W PC PIN TOP", Color=Blue, Insulation Resistance=1GR, Manufacturer Series=3296, Max Operating Temperature=125°C, Max Power Dissipation=500mW, Min Operating Temperature=-55°C, Package Quantity=50, Resistance=10kR, Resistance Law=Linear, Resistance Tolerance=10%, Resistor Type=Cermet, Temperature Coefficient=100ppm/°C, Actuator Orientation=Vertical, Actuator Type=SCREW, Depth=4.83mm, Height=0.395inch, Lead Free="Lead Free", Length=9.53mm, Military Standard=Not, Mount=Panel, Number of Pins=3, Number of Terminals/Pins=3, Number of Turns=25, Packaging=Rail/Tube, Power Rating=500mW, Radiation Hardening=No, REACH SVHC="No SVHC", RoHS Compliant=Yes, Series=3296, Taper=Linear, Technology=CERMET, Terminal Finish=Tin, Termination=Pin, Tolerance=10%, Type=Potentiometer, Weight=0.03oz, Width=9.53mm
SW1: library part CMP-10038-000022-1, "SWITCH SLIDE DPDT 300MA 6V", Actuator Color=Black, Contact Current Rating=100mA, Contact Resistance=70mR, Current Rating=300mA, Flammability Rating="UL94 V-0", Max Operating Temperature=85°C, Max Voltage Rating (DC)=6V, Min Operating Temperature=-40°C, Package Quantity=1, Actuator Length=2mm, Actuator Material=Nylon, Actuator Type=Standard, Contact Material="Copper Alloy", Contact Plating=Silver, Depth=3.6mm, Electrical Life=5000Cycles, Housing Material=Nylon, Illumination Type=Non-Illuminated, Lead Free="Lead Free", Length=9mm, Max Current Rating=300mA, Mount="Through Hole", Orientation=Vertical, Packaging=Bulk, Radiation Hardening=No, REACH SVHC="No SVHC", RoHS Compliant=Yes, Series=JS, Switch Function=On-On, Switch Travel=2mm, Termination="PC Pins", Throw Configuration=DPDT, Voltage Rating (DC)=6V
U1: library part CMP-0271-00178-3, "Advanced LinEPIC Self-Calibrating Precision Dual Operational Amplifier, 4 to 6 V, 0 to 70 degC, 8-pin SOIC (D8), Green (RoHS & no Sb/Br)", Manufacturer="Texas Instruments", Total Supply Voltage(Max)(+5V is 5, +/-5V is 10)=6, Total Supply Voltage(Min)(+5V is 5, +/-5V is 10)=4, CMRR(Min)(dB)=90, Code_JEDEC=MS-012, ComponentLink1Description="Manufacturer URL", ComponentLink1URL=http://www.ti.com/, ComponentLink2Description=Datasheet, ComponentLink2URL=http://www.ti.com/general/docs/lit/getliterature.tsp?genericPartNumber=TLC4502&fileType=pdf, ComponentLink3Description="Package Specification", ComponentLink3URL=http://www.ti.com/litv/pdf/msoi002j, DatasheetVersion=SLOS221B, Eco-Plan="Green (RoHS & no Sb/Br)", IIB(Max)(pA)=60, Iq per channel(Max)(mA)=3.5, Mounting Technology="Surface Mount", Number of Channels=2, Offset Drift(Typ)(uV/C)=1, PackageDescription="8-Pin Plastic Small Outline, Body 4.9 x 3.9 mm, Pitch 1.27 mm", PackageReference=D0008A, PackageVersion="4040047-3/M, 06/2011", PartNumber=TLC4502CDR, Slew Rate(Typ)(V/us)=2.5, Sub Family="Low Offset Voltage Amplifier (<=500uV), Precision Amplifier", Vio (25C)(Max)(mV)=0.1, Vn at 1kHz(Typ)(nV/rtHz)=12
U2 U3: library part CMP-04895-000061-1, "IC OPAMP GP 2 CIRCUIT 8SOIC", Ambient Temperature Range High=+70°C, Ambient Temperature Range Low=0°C, Input Bias Current=-0.015uA, Input Offset Voltage=2mV, Manufacturer="Texas Instruments", Max Dual Supply Voltage=15V, Max Junction Temp=+150°C, Max Supply Voltage=30V, Min Dual Supply Voltage=1.5V, Min Supply Voltage=3V, Nominal Supply Current=350uA, Output Current per Channel=-60mA, Package=D0008A, Temperature="0°C to +70°C", Voltage Gain=100V/mV, Automotive=No, Bandwidth=1.2MHz, Category=IC, ComponentLink2Description=Datasheet, ComponentLink2URL=http://www.ti.com/lit/ds/symlink/lm358.pdf, Device Class L1="Integrated Circuits (ICs)", Device Class L2="Linear ICs", Device Class L3="Amplifiers - Op Amps", Digikey Description="IC OPAMP GP 2 CIRCUIT 8SOIC", Gain Bandwidth=0.7MHz, Height=1.75mm, Ipc Land Pattern Name=SOIC127P600X175-8, Lead Free=Yes, Manufacturer Part Number=LM358ADR, Mouser Description="Operational Amplifiers - Op Amps Dual Op Amp", Number of Channels=2, Octopart=https://octopart.com/lm358adr-texas+instruments-409263, RoHS=TRUE, Standoff Height=0.11mm, Temperature Range High=+70°C, Temperature Range Low=0°C
U4: library part CMP-1086-00003-4, "CMOS 14-Stage Ripple Carry Binary Counter / Divider and Oscillator, 3 to 18 V, -55 to 125 degC, 16-Pin SOIC (D), Green (RoHS & no Sb/Br), Tube", Manufacturer="Texas Instruments", Temperature Range="-55 to 125 degC", ComponentLink1Description="Manufacturer URL", ComponentLink1URL=http://www.ti.com, ComponentLink2Description=Datasheet, ComponentLink2URL=http://www.ti.com/lit/ds/symlink/cd4060b.pdf, ComponentLink3Description="Package Specification", ComponentLink3URL=http://www.ti.com/lit/ml/mpds178g/mpds178g.pdf, DatasheetVersion=SCHS049C, Mounting Technology="Surface Mount", Note1="Green (RoHS & no Sb/Br)", PackageDescription="16-Pin Plastic Small-Outline Package, Body 9.9 x 3.9 mm, Pitch 1.27 mm", PackageReference=D0016A, PackageVersion=4040047-6/M, Packing=Tube, PartNumber=CD4060BM, tPHL, tPLH (typ) @ 5 V="370 ns", VDD="3 to 18 V"
U5: library part CMP-04895-000279-1, "IC OPAMP GP 4 CIRCUIT 14TSSOP", Case/Package=TSSOP, Input Bias Current=250nA, Input Offset Voltage (Vos)=7mV, Max Operating Temperature=125°C, Max Supply Voltage=5.5V, Min Operating Temperature=-40°C, Min Supply Voltage=2.7V, Nominal Supply Current=170uA, Operating Supply Current=410uA, Output Current=160mA, Package Quantity=2000, Power Supply Rejection Ratio (PSRR)=50dB, Voltage Gain=100dB, Amplifier Type="GENERAL PURPOSE", Bandwidth=1MHz, Common Mode Rejection Ratio=50dB, Contact Plating=Gold, Gain Bandwidth Product=1MHz, Height=1.15mm, Lead Free="Lead Free", Length=5mm, Mount="Surface Mount", Number of Amplifiers=4, Number of Channels=4, Number of Circuits=4, Number of Elements=4, Number of Pins=14, Output Current per Channel=160mA, Packaging="Tape and Reel", Radiation Hardening=No, REACH SVHC="No SVHC", RoHS Compliant=Yes, Series=-, Slew Rate=1V/µs, Supply Current=170uA, Technology=BICMOS, Unity Gain Bandwidth Product=1MHz, Width=4.4mm
U6: library part CMP-1628-00005-2, "Dual 4-Line To 1-Line Data Selectors/Multiplexers, D0016A, LARGE T&R", F @ Nom Voltage(Max)(Mhz)=28, Generic Part Number=SN74HC153, ICC @ Nom Voltage(Max)(mA)=8, Manufacturer="Texas Instruments", Operating Temperature Range(C)="-40 to 85", Rating=Catalog, tpd @ Nom Voltage(Max)(ns)=38, Voltage(Nom)(V)=3.3,5, Bits(#)=4, Channels(#)=2, Code_JEDEC="MS-012 variation AC", Configuration=4：1, DatasheetVersion=SCLS112D, Function=Encoder/Multiplexer, Input Type=LVTTL/CMOS, Output Drive (IOL/IOH)(Max)(mA)=7.8/-7.8, Output Type=CMOS, PackageReference=D0016A, Schmitt Trigger=No, Technology Family=HC, Type=Standard, VCC(Max)(V)=6, VCC(Min)(V)=2
U7: library part CMP-04895-000136-1, "IC OPAMP GP 2 CIRCUIT 8SOIC", Case/Package=SOIC, Input Bias Current=250nA, Input Offset Voltage (Vos)=7mV, Max Operating Temperature=125°C, Max Supply Voltage=5.5V, Min Operating Temperature=-40°C, Min Supply Voltage=2.7V, Nominal Supply Current=440uA, Operating Supply Current=210uA, Output Current=160mA, Package Quantity=2500, Power Supply Rejection Ratio (PSRR)=50dB, Voltage Gain=100dB, Bandwidth=1MHz, Common Mode Rejection Ratio=50dB, Contact Plating=Gold, Gain Bandwidth Product=1MHz, Height=1.58mm, Lead Free="Lead Free", Length=4.9mm, Mount="Surface Mount", Number of Amplifiers=2, Number of Channels=2, Number of Circuits=2, Number of Elements=2, Number of Pins=8, Output Current per Channel=160mA, Packaging="Tape and Reel", Radiation Hardening=No, REACH SVHC="No SVHC", RoHS Compliant=Yes, Slew Rate=1V/µs, Unity Gain Bandwidth Product=1MHz, Width=3.91mm
U8: library part CMP-0244-00406-1, "Positive Voltage Regulator, 5V, 4-Pin SOT-89, Tape and Reel", ComponentLink1Description="Manufacturer URL", ComponentLink1URL=http://www.st.com, ComponentLink2Description=Datasheet, ComponentLink2URL=http://www.st.com/internet/com/TECHNICAL_RESOURCES/TECHNICAL_LITERATURE/DATASHEET/CD00000446.pdf, DatasheetVersion=1/02/2011, PackageDescription="3-Pin SOT-89 Package 1.5 mm Pitch, 4.1 mm Lead Span", PackageReference=SOT-89, PackageVersion=2011
U9: library part CMP-209535-000001-1, "LDO Voltage Regulators 1A, 3.3V", Dropout Voltage=1.1V, Manufacturer="Advanced Monolithic Systems", Max Junction Temp=+125°C, Max Power Dissipation=1.2W, Max Supply Voltage=15V, Nominal Supply Current=5mA, Output Current=1A, Output Voltage=3.3V, Package=AMS1117, Temperature="-40°C to +125°C", Temperature Range Low=-40°C, Automotive=No, Category=IC, ComponentLink2Description=Datasheet, ComponentLink2URL=http://www.advanced-monolithic.com/pdf/ds1117.pdf, Device Class L1="Integrated Circuits (ICs)", Device Class L2="Power Management ICs", Device Class L3="Voltage Regulators - Linear", Height=1.8mm, Ipc Land Pattern Name=SOT229P700X180-4, Lead Free=Yes, Manufacturer Part Number=AMS1117-3.3, Number of Outputs=1, Octopart=https://octopart.com/ams1117-3.3-advanced+monolithic+systems-25899300, Output Type=Fixed, RoHS=TRUE, Standoff Height=0.64mm, Temperature Range High=+125°C
U10: library part CMP-0391-00019-3, "IC REG CHARG PUMP INV 60MA SOT23", Case/Package=SOT-23-5, Max Input Voltage=5.25V, Max Operating Temperature=85°C, Max Output Current=60mA, Max Output Voltage=-5.25V, Min Input Voltage=1.8V, Min Operating Temperature=-40°C, Min Output Voltage=-1.6V, Operating Supply Current=125uA, Package Quantity=3000, Switching Frequency=250kHz, Contact Plating=Gold, Lead Free="Lead Free", Logic Function=Inverting, Max Supply Voltage=5.25V, Min Supply Voltage=1.8V, Number of Outputs=1, Number of Pins=5, Output Current=60mA, Output Type=Adjustable, Output Voltage=-5.25V, Packaging="Tape and Reel", Quiescent Current=125uA, Radiation Hardening=No, REACH SVHC="No SVHC", Synchronous Rectifier=No, Weight=0.000459oz

## Via types
v1: diameter 23.62, hole 11.81, Top Layer to Bottom Layer, 42 vias

## Nets (pads, with @x,y where several pads share a name; then routed paths per layer and width w, separated by ;. In a path a pad name is that pad's centre, name@x,y a point inside that pad or via, vN(x,y) a via of type N, cw(c..) or ccw(c..) an arc to the next point about the centre after c; other vN are vias at no path point)
3.3V: C1.2 C10.2 C13.1 C14.1 C21.1 C22.1 C24.1 C25.1 J1.1 MCU.8 R1.1 R2.2 R3.1 U4.16 U5.4 U9.2 U10.2 | length 3131.1
  Top Layer w5: U9.2 232.88,160 325,252.12 325,390.97 351.63,417.6 U10.2 415.09,417.6 427.49,430 v1(430,430) ; v1(560,445) 560,442.44 595.47,406.97 C24.1 ; C22.1 690.47,291.97 744.94,346.44 751.44,346.44 v1(755,350) ; v1(805,330) 808.56,326.44 817.07,326.44 843.03,300.47 C25.1 1016.53,300.47 1060,257.01 U5.4 1060,196.59 1087.27,169.31 1093,169.31 1193.93,68.38 1255.4,68.38 U4.16 ; C13.1 1701.97,1064.53 1757.44,1120 2450,1120 2468.12,1138.12 C1.2@2468.12,1203.06 ; R2.2 R1.1 2435.47,1419.45 2500,1354.92 R3.1 2500,1248.82 2468.12,1216.94 C1.2 C1.2@2468.12,1203.06 ; MCU.8 2505.28,1165.91 C1.2@2468.12,1203.06
  Bottom Layer w5: v1(430,430) 455,455 547.76,455 557.76,445 v1(560,445) ; v1(755,350) 785,350 v1(805,330)
5V: C5.1 C6.1 C7.1 C18.1 C28.1 J1.3 P1.3 P2.3 R9.2 R20.2 R21.1 R23.2 R26.3 R29.2 R40.1 R41.1 R42.3 R50.1 U1.8 U3.4 U6.16 U7.4 U8.1 | length 4968.3
  Top Layer w5: U8.1 174.06,492.05 183.37,501.36 355.81,501.36 389.53,535.08 R40.1 R41.1 ; P2.3 280,800 464.45,800 509.53,754.92 514.61,760 U7.4 617.4,760 647.4,790 v1(670,790) ; v1(455,485) 455,539.53 R41.1 ; R50.1 515.87,743.65 536.35,743.65 v1(550,730) ; R26.3 665,1445 765,1345 820,1345 836.22,1328.78 U1.8 818.45,1290 808.16,1279.7 808.16,1266.7 733.13,1191.67 733.13,1032.19 R9.2 715.94,1010.08 675.87,970 v1(675,970) ; C18.1 690.94,61.97 780,151.02 780,436.82 762.29,454.53 745,454.53 C28.1 729.53,470 520.55,470 455.47,535.08 R41.1 ; R20.2 1115,1010.08 1132.19,992.89 1137.11,992.89 1181.02,948.98 1181.02,879.06 1215.08,845 R21.1 1280.65,845 1310.65,875 1375,875 1385,885 1385,955 1370,970 1280,970 1267.66,982.34 1267.66,997.81 R23.2 ; R29.2 1715.94,209.92 1748.95,242.93 1822.07,242.93 1845,220 1845,80 1865,60 2180,60 v1(2205,85)
  Bottom Layer w5: P1.3 P2.3 ; v1(455,485) 550,580 v1(550,730) ; v1(670,790) 672.5,792.5 672.5,967.5 v1(675,970) ; v1(2205,85) 2456.57,336.57 J1.3
-3.3V: C8.1 C11.1 C12.1 C26.1 C27.1 U4.8 U4.12 U5.11 U10.1 | length 822
  Top Layer w5: U10.1 388.37,380.2 533.57,235 v1(750,235) ; v1(785,115) 785,117.91 843.03,175.94 C27.1 846.97,175.94 885,137.91 885,90.94 860.22,66.16 860.22,64.19 846.97,50.94 C26.1
  Bottom Layer w5: v1(750,235) 750,150 v1(785,115)
A_OUT: C30.1 R48.1 SW1.6 | length 202.1
  Top Layer w5: R48.1 776.71,627.81 776.71,608.29 795,590 795,520 811.75,503.25 831.75,503.25 C30.1
ADC: MCU.2 U6.7 | length 1542.3
  Top Layer w5: v1(1950,1315) U6.7 ; v1(2265,505) 2265,418.57 2468.41,215.16 2468.41,194.27 2489.53,173.15 MCU.2
  Bottom Layer w5: v1(1950,1315) 1950,670 2115,505 v1(2265,505)
D_OUT: C29.1 LED_R1.2 R44.1 SW1.4 | length 433
  Top Layer w5: LED_R1.2 v1(2655,1110)
  Bottom Layer w5: SW1.4 2655.14,1413.37 2655.14,1110.14 v1(2655,1110)
DOUT: C4.1 LED_R.2 U3.1
DTR: J1.6 MCU.18 R3.2 | length 1712.1
  Top Layer w5: MCU.18 2109.37,409.37 v1(2305,605) ; R3.2 2440.94,1319.06 v1(2470,1290) ; v1(2625,670) 2663.94,631.06 J1.6@2714.33,631.06
  Bottom Layer w5: v1(2305,605) 2370,670 v1(2625,670) 2600,694.96 2600,1215 2525,1290 v1(2470,1290)
GND: C1.1 C2.2 C3.1 C4.2 C5.2 C6.2 C7.2 C8.2 C10.1 C11.2 C12.2 C13.2 C14.2 C15.2 C16.2 C17.2 C18.2 C19.2 C20.2 C21.2 C22.2 C24.2 C25.2 C26.2 C27.2 C28.2 C29.2 C30.2 D1.2 D6.2 J1.2 LED_G.2 LED_R2.2 LED_R3.2 MCU.15 P1.1 P3.2 R4.2 R6.1 R8.2 R10.1 R13.1 R15.1 R16.1 R19.1 R26.1 R33.1 R43.1 R46.2 R47.2 U1.4 U3.8 U5.10 U6.1 U6.8 U7.8 U8.2 U9.1 U10.4
IN1: P4.1 R28.2 U5.1 | length 864.8
  Top Layer w5: U5.1 983.23,91.77 P4.1 1042.64,80 1112.26,10.37 1655,10.37 ; R28.2 R28.2@1733.13,107.81
NetC2_1: C2.1 R7.1 R8.1 U1.5 | length 681.2
  Top Layer w5: R7.1 520.47,845.47 545,870 v1(545,940) ; v1(505,1045) 550.47,1045 558.37,1037.11 563.29,1037.11 580.47,1019.92 R8.1 597.66,1032.19 597.66,1037.11 635.55,1075 v1(690,1075) ; v1(810,1090) 810,1129.7 820.3,1140 U1.5
  Bottom Layer w5: v1(505,1045) 545,1005 v1(545,940) ; v1(690,1075) 795,1075 v1(810,1090)
NetC3_2: C3.2 R18.2 U2.5
NetC9_1: C9.1 R30.2 R31.2
NetC9_2: C9.2 U4.9
NetC15_1: C15.1 R34.1 R39.2 | length 792.7
  Top Layer w5: R34.1 965,564.92 1015.08,615 1235,615 1270,580 1710.47,580 R39.2
NetC16_1: C16.1 D6.1 R39.1 U6.5 | length 1092.4
  Top Layer w5: D6.1 1805,929.1 1789.1,945 1685,945 1655,975 1655,1252.09 1619.06,1288.03 C16.1 1820,1290 1855,1325 1855,1415 1870,1430 2040,1430 2050,1420 U6.5
NetC17_1: C17.1 P3.1 U8.3 | length 957
  Top Layer w5: U8.3 55.94,475.94 50,470 50,454.61 30,434.61 30,135 50,115 105,115 P3.1 205,15 522.44,15 565.47,58.03 C17.1
NetC23_1: C23.1 U10.5 | length 300.4
  Top Layer w5: U10.5 283.35,341.65 v1(300,325) ; v1(470,345) C23.1
  Bottom Layer w5: v1(300,325) 450,325 v1(470,345)
NetC23_2: C23.2 U10.3 | length 180.9
  Top Layer w5: U10.3 481.02,455 529.06,406.97 C23.2
NetD1_1: D1.1 R7.2 R23.1 | length 1079.8
  Top Layer w5: v1(455,950) 458.56,946.44 458.56,935.96 467.89,926.63 467.89,921.71 485.08,904.53 R7.2 ; v1(1235,1080) 1238.56,1076.44 1253.01,1076.44 1309.53,1019.92 R23.1
  Bottom Layer w5: v1(455,950) 455,1050 475,1070 645,1070 669.31,1045.69 863.64,1045.69 897.95,1080 v1(1235,1080)
NetD2_1: D2.1 D5.2 U5.7
NetD2_2: D2.2 D3.2 R34.2 R37.1 R38.1 | length 466.1
  Top Layer w5: R34.2 1024.06,564.92 1041.24,582.11 1046.16,582.11 1064.06,600 1235.86,600 1285.86,550 1390,550 1396.87,543.13 1396.87,517.19 R37.1
NetD3_1: D3.1 D4.2 U5.14
NetD4_1: D4.1 R38.2 U5.13
NetD5_1: D5.1 R37.2 U5.6
NetLED_G_1: LED_G.1 R20.1
NetLED_R1_1: LED_R1.1 R41.2
NetLED_R2_1: LED_R2.1 R50.2
NetLED_R3_1: LED_R3.1 R29.1
NetLED_R_1: LED_R.1 R21.2
NetMCU_3: MCU.3 R2.1
NetMCU_16: MCU.16 R4.1
NetMCU_17: MCU.17 P1.2 R40.2 | length 391
  Top Layer w5: v1(275,545) 325.47,545 R40.2
  Bottom Layer w5: P1.2 165,670 165,570 190,545 v1(275,545)
NetP2_1: P2.1 R47.1 | length 455.9
  Top Layer w5: P2.1 285,595 594.45,595 639.53,640.08 R47.1
NetP2_2: P2.2 R45.2 R46.1 R49.2 | length 428.6
  Top Layer w5: P2.2 R49.2 330.47,645.47 R45.2 330,640.08 347.19,622.89 352.11,622.89 370,605 478.98,605 514.06,640.08 R46.1
NetP4_2: P4.2 R32.2 R33.2 U5.9 | length 421.3
  Top Layer w5: v1(1045,150) 1045,130 P4.2 ; v1(1100,355) 1100,359.95 1111.18,371.13 U5.9
  Bottom Layer w5: v1(1045,150) 1045,300 v1(1100,355)
NetR5_1: R5.1 R6.2 U1.2 | length 1207.7
  Top Layer w5: R5.1 405.08,845.47 369.61,810 305,810 295,820 295,900 250,945 250,1380 260,1390 315,1390 340,1365 469.09,1365 594.09,1240 U1.2
NetR9_1: R9.1 R10.2 U3.5
NetR11_1: R11.1 R14.1 R15.2
NetR11_2: R11.2 R13.2 U2.3
NetR12_1: R12.1 R16.2 R25.1
NetR12_2: R12.2 R17.1 U2.2
NetR14_2: R14.2 R25.3 U3.6 U3.7
NetR17_2: R17.2 R18.1 U2.1
NetR19_2: R19.2 R24.1 U2.6
NetR22_2: R22.2 U3.3
NetR26_2: R26.2 U3.2 | length 614.8
  Top Layer w5: R26.2 845.2,1345 1190,1345 1210,1325 1210,1260 1222.7,1247.3 1257.7,1247.3 U3.2
NetR27_2: R27.2 R28.1 U5.2 | length 969
  Top Layer w5: U5.2 1008.82,196.59 1031.44,173.97 1061.03,173.97 v1(1085,150) ; R27.2 1715.94,49.92 1665,100.87 v1(1665,125) 1668.56,128.56 1668.56,138.56 1695,165 1739.92,165 1775,129.92 R28.1
  Bottom Layer w5: v1(1085,150) 1640,150 v1(1665,125)
NetR30_1: R30.1 U4.10
NetR31_1: R31.1 U4.11
NetR32_1: R32.1 R35.2 R36.2 U5.8
NetR35_1: R35.1 U5.5 | length 410.4
  Top Layer w5: U5.5 1085.59,257.01 1112.16,283.57 1155.64,283.57 1180,307.93 1180,524.61 1149.53,555.08 R35.1
NetR36_1: R36.1 U5.12
NetR42_1: R42.1 R43.2
NetR42_2: R42.2 U7.2
NetR44_2: R44.2 U7.1 | length 421.9
  Top Layer w5: U7.1 615.39,910 624.7,900.69 624.7,885.75 700,810.45 v1(700,760) ; v1(700,595) 700,540.47 R44.2
  Bottom Layer w5: v1(700,595) v1(700,760)
NetR45_1: R45.1 U7.3 | length 300.9
  Top Layer w5: R45.1 389.06,684.06 v1(405,700) ; v1(540,800) 567.76,800 568.45,800.69 570.69,800.69 580,810 U7.3
  Bottom Layer w5: v1(405,700) 505,800 v1(540,800)
NetR48_2: R48.2 U7.6 U7.7 | length 354.6
  Top Layer w5: R48.2 700.47,649.92 717.66,667.11 722.58,667.11 740.47,685 805,685 855,735 855,795 849.31,800.69 820.61,800.69 U7.6 U7.7
NetR49_1: R49.1 U7.5 | length 478
  Top Layer w5: R49.1 389.53,745.08 406.71,727.89 411.63,727.89 434.53,705 760,705 785.3,730.3 785.3,750.69 794.61,760 U7.5
p_AOUT: R5.2 R22.1 U1.1 U6.4 | length 3348.7
  Top Layer w5: U1.1 619.61,1284.17 650.83,1284.17 695,1240 695,1120 665,1090 329.21,1090 279.61,1040.39 279.61,955 330.08,904.53 R5.2 339.92,904.53 404.7,969.31 617.7,969.31 642.01,945 855,945 870,930 870,670 880,660 1164.61,660 1215.08,710.47 R22.1 1215,705.47 v1(1215,645) ; v1(2085,1320) 2085,1325.04 2093.62,1333.66 2093.62,1381.97 U6.4
  Bottom Layer w5: v1(1215,645) 1904.31,1334.31 2003.83,1334.31 2018.14,1320 v1(2085,1320)
PH+: J2.1 U1.3 | length 366.9
  Top Layer w5: J2.1 454.02,1330.08 594.09,1190 U1.3
PH-: J2.2 J2.3 J2.4 J2.5 U1.6 U1.7 | length 1239.3
  Top Layer w5: v1(770,1185) 831.22,1185 U1.6 U1.7
  Bottom Layer w5: J2.2 J2.3 J2.4 J2.5 754.84,1200.16 v1(770,1185)
PIN7: R27.1 U4.7
RST: MCU.1 R1.2 | length 1432
  Top Layer w5: R1.2 2494.53,1450.08 2575,1369.61 2575,148.39 2521.02,94.41 MCU.1
RX: J1.5 MCU.21 | length 939.5
  Top Layer w5: MCU.21 2138.15,173.15 v1(2210,245)
  Bottom Layer w5: v1(2210,245) 2498.43,533.43 J1.5
S0: MCU.11 U6.14
S1: MCU.12 U6.2 | length 700.5
  Top Layer w5: v1(2165,1080) 2165,710.28 MCU.12 ; v1(2185,1325) 2185,1330.04 2193.62,1338.66 2193.62,1381.97 U6.2
  Bottom Layer w5: v1(2165,1080) 2165,1305 v1(2185,1325)
Senser_OUT: SW1.5 U6.6 | length 721.6
  Top Layer w5: U6.6 2006.38,1381.97 2006.38,1313.62 2025,1295 v1(2410,1295)
  Bottom Layer w5: v1(2410,1295) 2465,1350 SW1.5
t_AOUT: R24.2 U2.7 | length 397.7
  Top Layer w5: U2.7 1175,1240 1210.83,1204.17 1210.83,994.17 1271.22,933.78 1278.29,933.78 1295.47,916.6 R24.2
TX: J1.4 MCU.22 | length 941.3
  Top Layer w5: MCU.22 1914.72,95.28 1910,100 1925.53,115.53 2160.53,115.53 v1(2210,165)
  Bottom Layer w5: v1(2210,165) 2480,435 J1.4
VCC: C19.1 C20.1 U9.3 | length 628.8
  Top Layer w5: U9.3 504.84,69.84 565.38,130.38 C19.1@565.38,164.06 ; C19.1@565.94,164.06 573.02,164.06 577.29,159.78 577.29,152.71 610,120 699.53,120 739.31,159.78 741.28,159.78 754.53,173.03 C20.1
pads on no net: J1. MCU.4 MCU.5 MCU.6 MCU.7 MCU.9 MCU.10 MCU.13 MCU.14 MCU.19 MCU.20 R25.2 SW1.1 SW1.2 SW1.3 U2.4 U2.8 U4.1 U4.2 U4.3 U4.4 U4.5 U4.6 U4.13 U4.14 U4.15 U5.3 U6.3 U6.9 U6.10 U6.11 U6.12 U6.13 U6.15 U9.4

## Polygon pours and split planes (outlines as drawn)
GND on Top Layer "NONET_L01_P000" (solid, shelved, pour order 0): 1820,1420 1788.5,1385 905,1385 905,1470 805,1570 535,1570 535,1140 45,744.89 45,20 2735,20 2830,115 2830,1355 2765,1420 2470,1420 2765,1420 2470,1420